# Altium PCB PCB.PcbDoc
Units mm, origin at the board's own origin, x right, y up, seen from the top; angles counter-clockwise.
Board outline 67.95 x 87 mm, 2 copper layers (Top Layer, Bottom Layer); 64 components, 68 nets, 243 pads, 96 vias.
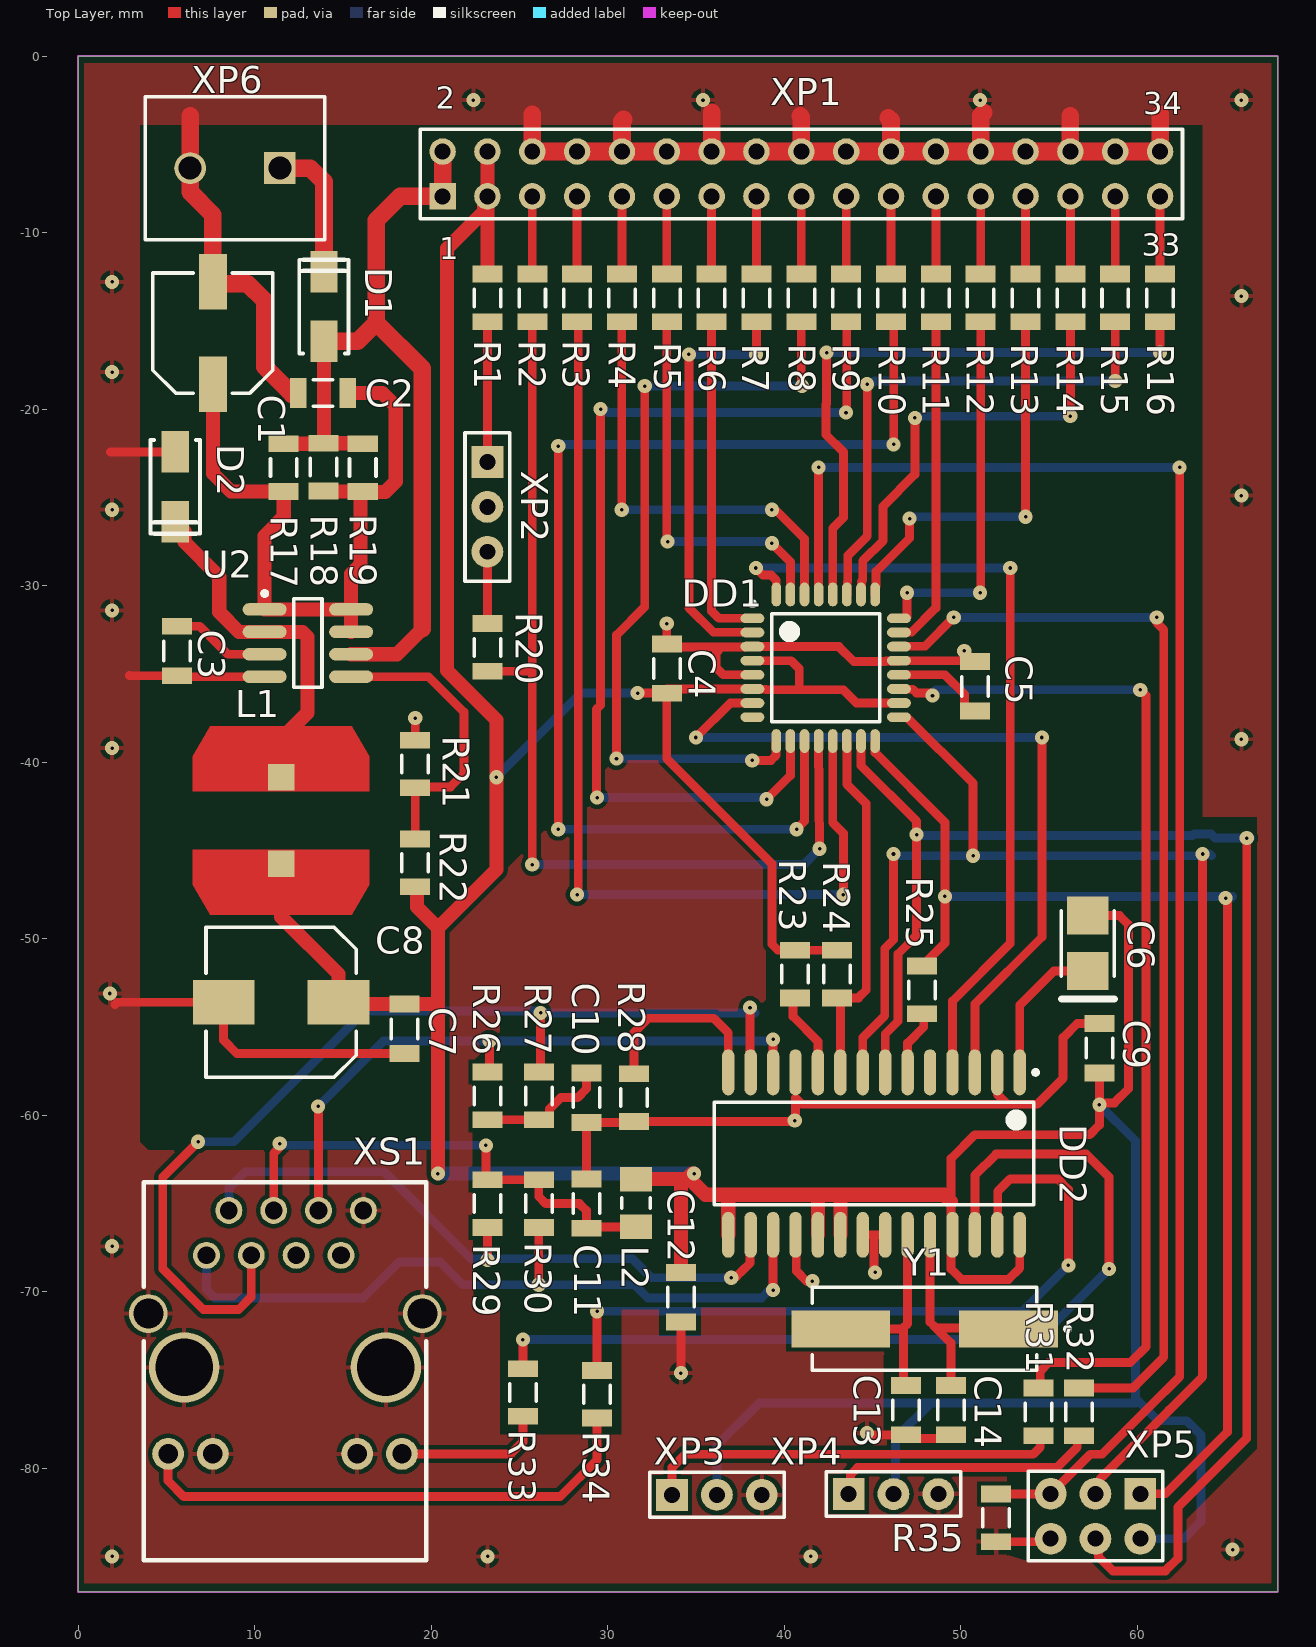
[diagram p0: Top Layer view]
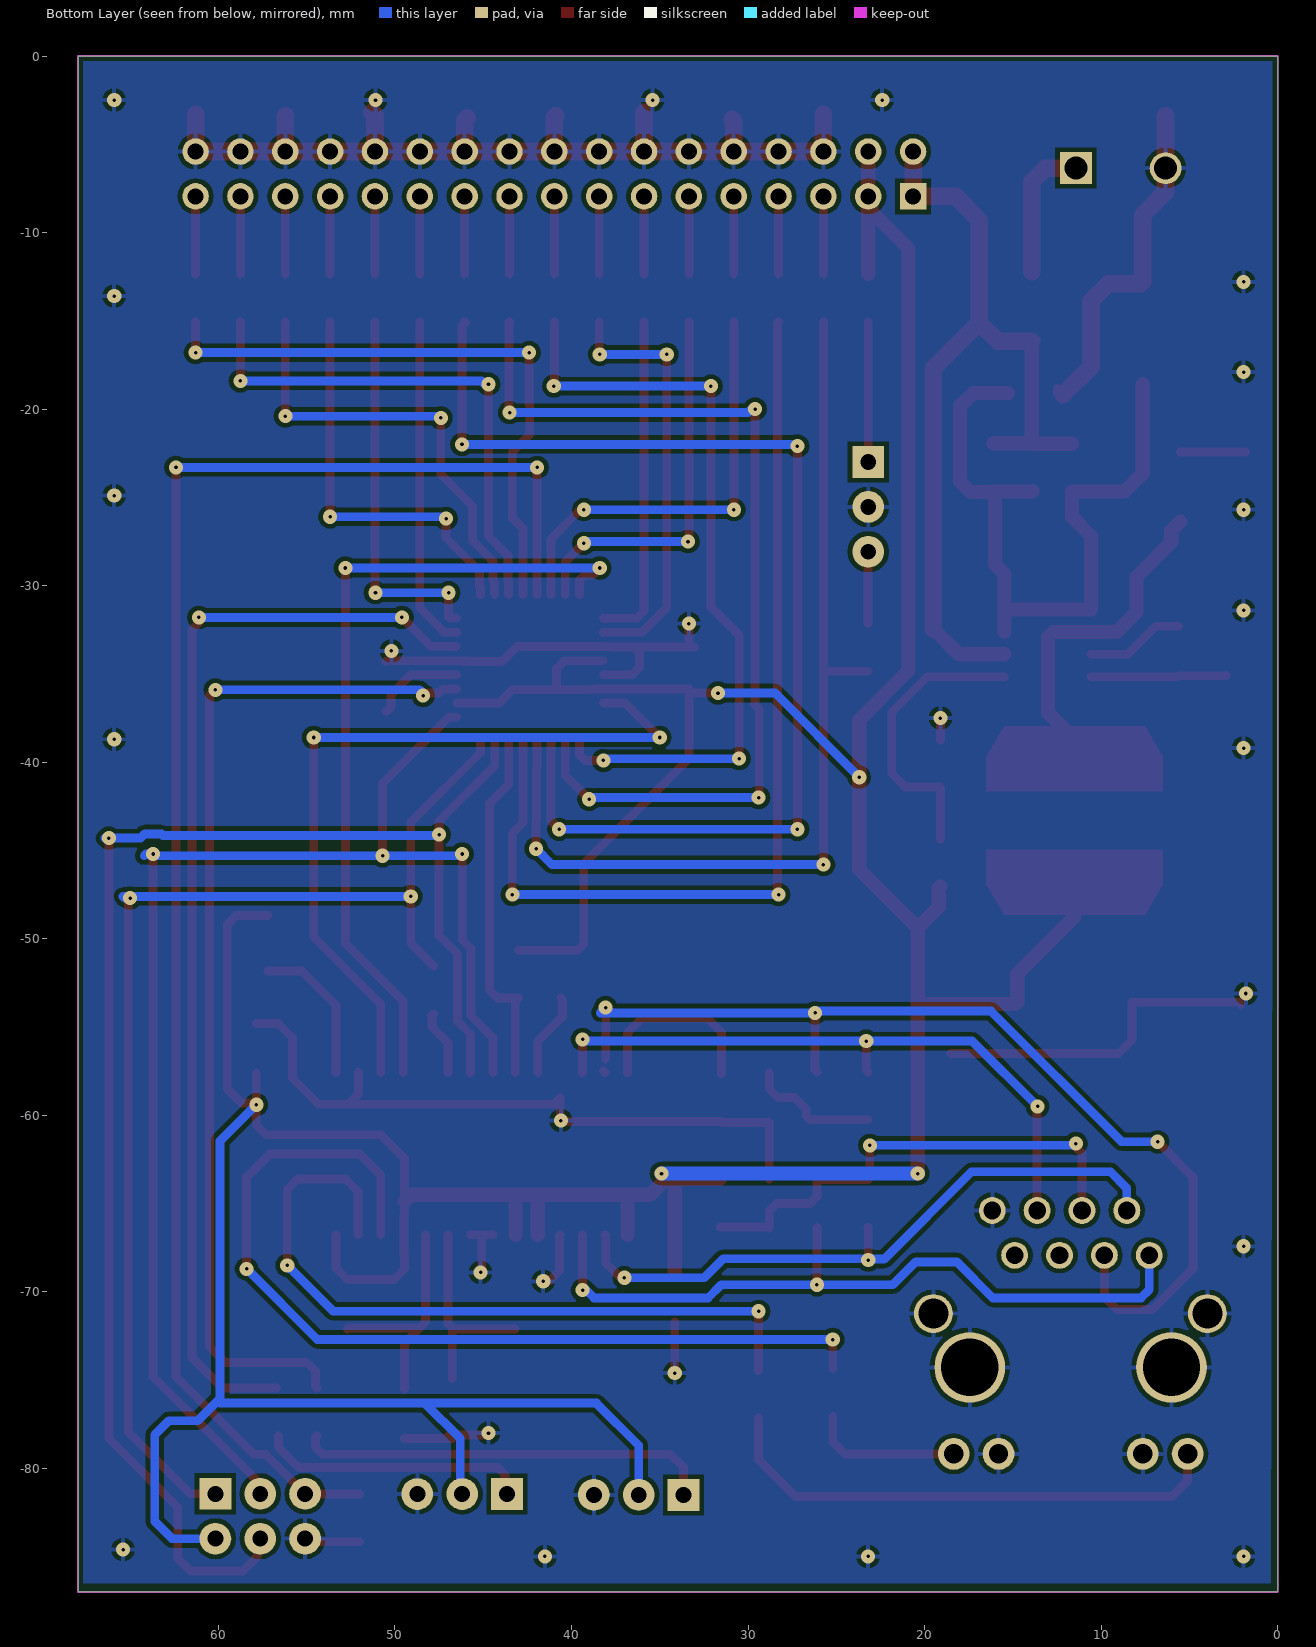
[diagram p1: Bottom Layer view, seen from below]

## Layer stack, top to bottom
Top Solder: solder mask 0.0102, Solder Resist, Dk 3.5
Top Layer: signal copper 0.0356
Dielectric 1: dielectric 0.32, FR-4, Dk 4.8
Bottom Layer: signal copper 0.0356
Bottom Solder: solder mask 0.0102, Solder Resist, Dk 3.5

## Board outline
0,-87 67.95,-87 67.95,0 0,0

## Design rules (kind name [scope] priority, off if disabled: settings)
Clearance [All] p1: gap=0.254 ignorepadtopadclearanceinfootprint=TRUE except(0: Arc-Hole Track-Hole SMDPad-Hole THPad-Hole Via-Hole Fill-Hole Poly-Hole Region-Hole Text-Hole)
HoleSize [All] p1 off: absolutevalues=TRUE maxlimit=2.54 minlimit=0.025 maxpercent=80.000 minpercent=20.000
HoleToHoleClearance [All] p1 off: gap=0.254 allowstackedmicrovias=TRUE
MinimumSolderMaskSliver [All] p1 off: minsoldermaskwidth=0.254
PolygonConnect [All] p1: connectstyle=Relief reliefconductorwidth=0.254 reliefentries=4 polygonreliefangle="90 Angle" airgapwidth=0.254
RoutingVias [All] p1: holewidth=0.711 width=0.8 viastyle="Through Hole" minholewidth=0.711 minwidth=0.8 maxholewidth=0.711 maxwidth=1.27
SilkToSilkClearance [All] p1 off: silktosilkclearance=0.254
SilkToSolderMaskClearance [IsPad] p1 off: minsilkscreentomaskgap=0.254 clearancetoexposedcopper=TRUE
SolderMaskExpansion [All] p1: expansion=0.1
Width GND [InNet('GND')] p1: maxlimit=1 minlimit=0.5 preferedwidth=0.8 minimp=50.000000 maximp=50.000000 favimp=50.000000
Width +12 [InNet('+12')] p2: maxlimit=1 minlimit=0.5 preferedwidth=0.8 minimp=50.000000 maximp=50.000000 favimp=50.000000
Width VCC [InNet('VCC')] p3: maxlimit=1 minlimit=0.5 preferedwidth=0.8 minimp=50.000000 maximp=50.000000 favimp=50.000000
Width +5 [InNet('NetC1_1')] p4: maxlimit=1 minlimit=0.5 preferedwidth=0.8 minimp=50.000000 maximp=50.000000 favimp=50.000000
Width +5_2 [InNet('NetD2_1')] p5: maxlimit=1 minlimit=0.5 preferedwidth=0.8 minimp=50.000000 maximp=50.000000 favimp=50.000000
Width +5_1 [InNet('+5')] p6: maxlimit=1 minlimit=0.5 preferedwidth=0.8 minimp=50.000000 maximp=50.000000 favimp=50.000000
Width Width_1 [All] p7: maxlimit=0.5 minlimit=0.254 preferedwidth=0.35 minimp=50.000000 maximp=50.000000 favimp=50.000000
25 further rules are at their usual default settings.

## Classes and differential pairs
component class Power: C1 C2 C3 C7 C8 D1 D2 L1 R17 R18 R19 R21 R22 U2 XP6
component class MCU: C4 C5 C9 DD1 R1 R2 R3 R4 R5 R6 R7 R8 R9 R10 R11 R12 R13 R14 R15 R16 R20 R31 R32 R35 XP1 XP2 XP3 XP4 XP5
component class LAN: C6 C10 C11 C12 C13 C14 DD2 L2 R23 R24 R25 R26 R27 R28 R29 R30 R33 R34 XS1 Y1

## Components (designator, comment, footprint, x,y, rotation, side; value= is the part's Value field where it differs from the comment)
C1 "CAP_ELEC_SMD" ECAP_SMD_6.3mmx5.4mm 7.64,-15.69 r90 top
C2 "CAP_SMD" CAPC1206(3216)170_L 13.88,-19.08 r0 top
C3 "CAP_SMD" CAPC1206(3216)170_L 5.6,-33.7 r90 top
C4 "CAP_SMD" CAPC1206(3216)170_L 33.35,-34.7 r270 top
C5 "CAP_SMD" CAPC1206(3216)170_L 50.8,-35.7 r270 top
C6 "CAP_Tantalum" CAP_3530 57.2,-50.26 r90 top
C7 "CAP_SMD" CAPC1206(3216)170_L 18.5,-55.1 r90 top
C8 "CAP_ELEC_SMD" ECAP_SMD_8mmx10mm 11.5,-53.6 r180 top
C9 "CAP_SMD" CAPC1206(3216)170_L 57.85,-56.2 r270 top
C10 "CAP_SMD" CAPC1206(3216)170_L 28.8,-59 r270 top
C11 "CAP_SMD" CAPC1206(3216)170_L 28.8,-65 r90 top
C12 "CAP_SMD" CAPC1206(3216)170_L 34.15,-70.3 r90 top
C13 "CAP_SMD" CAPC1206(3216)170_L 46.9,-76.7 r270 top
C14 "CAP_SMD" CAPC1206(3216)170_L 49.45,-76.7 r270 top
D1 "SS14" DO-214 13.93,-14.19 r270 top
D2 "SS14" DO-214 5.5,-24.4 r90 top
DD1 "ATmega328-AU" 32A_L 42.35,-34.65 r0 top locked
DD2 "ENC28J60-I/SO" SO-28_M 45.085,-62.167 r270 top locked
L1 "220uH" SDR1006_SMD 11.5,-43.3 r0 top
L2 "Inductor" IND_1206 31.6,-64.969 r90 top value=10uH
R1 "RES_SMD" RESC1206(3216)_L 23.19,-13.7 r90 top
R2 "RES_SMD" RESC1206(3216)_L 25.73,-13.7 r90 top
R3 "RES_SMD" RESC1206(3216)_L 28.27,-13.7 r90 top
R4 "RES_SMD" RESC1206(3216)_L 30.81,-13.7 r90 top
R5 "RES_SMD" RESC1206(3216)_L 33.35,-13.7 r90 top
R6 "RES_SMD" RESC1206(3216)_L 35.89,-13.7 r90 top
R7 "RES_SMD" RESC1206(3216)_L 38.43,-13.7 r90 top
R8 "RES_SMD" RESC1206(3216)_L 40.97,-13.7 r90 top
R9 "RES_SMD" RESC1206(3216)_L 43.51,-13.7 r90 top
R10 "RES_SMD" RESC1206(3216)_L 46.05,-13.7 r90 top
R11 "RES_SMD" RESC1206(3216)_L 48.59,-13.7 r90 top
R12 "RES_SMD" RESC1206(3216)_L 51.13,-13.7 r90 top
R13 "RES_SMD" RESC1206(3216)_L 53.67,-13.7 r90 top
R14 "RES_SMD" RESC1206(3216)_L 56.21,-13.7 r90 top
R15 "RES_SMD" RESC1206(3216)_L 58.75,-13.7 r90 top
R16 "RES_SMD" RESC1206(3216)_L 61.29,-13.7 r90 top
R17 "RES_SMD" RESC1206(3216)_L 11.653,-23.31 r90 top
R18 "RES_SMD" RESC1206(3216)_L 13.903,-23.285 r90 top
R19 "RES_SMD" RESC1206(3216)_L 16.128,-23.31 r90 top
R20 "RES_SMD" RESC1206(3216)_L 23.2,-33.5 r90 top
R21 "RES_SMD" RESC1206(3216)_L 19.1,-40.1 r90 top
R22 "RES_SMD" RESC1206(3216)_L 19.1,-45.7 r270 top
R23 "RES_SMD" RESC1206(3216)_L 40.6,-52 r270 top
R24 "RES_SMD" RESC1206(3216)_L 43,-52 r270 top
R25 "RES_SMD" RESC1206(3216)_L 47.8,-52.9 r270 top
R26 "RES_SMD" RESC1206(3216)_L 23.2,-58.9 r270 top
R27 "RES_SMD" RESC1206(3216)_L 26.1,-58.9 r270 top
R28 "RES_SMD" RESC1206(3216)_L 31.5,-59 r90 top
R29 "RES_SMD" RESC1206(3216)_L 23.2,-65 r90 top
R30 "RES_SMD" RESC1206(3216)_L 26.1,-65 r90 top
R31 "RES_SMD" RESC1206(3216)_L 54.4,-76.8 r270 top
R32 "RES_SMD" RESC1206(3216)_L 56.7,-76.8 r270 top
R33 "RES_SMD" RESC1206(3216)_L 25.2,-75.7 r90 top
R34 "RES_SMD" RESC1206(3216)_L 29.4,-75.8 r90 top
R35 "RES_SMD" RESC1206(3216)_L 52,-82.8 r90 top locked
U2 "MC34063ABD-TR" SO-8_M 13.02,-33.25 r0 top
XP1 "" HDR2X17 20.65,-7.95 r0 top locked
XP2 "PBS-03" PBS-03 23.19,-23 r270 top locked
XP3 "PLS-03" PLS-03 33.65,-81.5 r0 top locked
XP4 "PLS-03" PLS-03 43.65,-81.45 r0 top
XP5 "PLS-03_2" PLS-03_2 60.17,-81.44 r180 top locked
XP6 "1729128" PHOE-1729128-2_V 8.89,-6.35 r180 top locked
XS1 "HR911105A" HR911105A 19.725,-63.8 r180 top locked
Y1 "25Mhz" Crystal_SMD 47.95,-72.1 r180 top locked

## Footprints (in the part's own frame and the unit in brackets; to place one, negate y for a bottom-side part, rotate by r counter-clockwise, add the part's x,y. Pads: shape width x height; smd on the part's side, far side on the other; paste and mask are expansions set on the pad)
32A_L [mm] "Thin QFP, 32-Leads, Body 7x7mm, Pitch 0.8mm, IPC High Density"
  oval 1.35x0.55 smd: 1(-4.15,2.8) 2(-4.15,2) 3(-4.15,1.2) 4(-4.15,0.4) 5(-4.15,-0.4) 6(-4.15,-1.2) 7(-4.15,-2) 8(-4.15,-2.8) 17(4.15,-2.8) 18(4.15,-2) 19(4.15,-1.2) 20(4.15,-0.4) 21(4.15,0.4) 22(4.15,1.2) 23(4.15,2) 24(4.15,2.8)
  oval 0.55x1.35 smd: 9(-2.8,-4.15) 10(-2,-4.15) 11(-1.2,-4.15) 12(-0.4,-4.15) 13(0.4,-4.15) 14(1.2,-4.15) 15(2,-4.15) 16(2.8,-4.15) 25(2.8,4.15) 26(2,4.15) 27(1.2,4.15) 28(0.4,4.15) 29(-0.4,4.15) 30(-1.2,4.15) 31(-2,4.15) 32(-2.8,4.15)
  silkscreen extent -4.27,-3.05 3.05,3.75, body extent -3.5,-3.5 3.5,3.5, height 1.2
CAP_3530 [mm] "Molded Capacitor, 2-Leads, Body 3.70x3.00mm, IPC Low Density"
  rect 2.15x2.35 smd: 1(-1.575,0) 2(1.575,0)
  silkscreen extent -3.15,-1.5 1.85,1.5, body extent -2.07,-1.5 2.07,1.5, height 2.1
CAPC1206(3216)170_L [mm] "Chip Capacitor, Body 3.2x1.6mm, Height 1.7mm, IPC High Density"
  rect 0.95x1.7 smd: 1(-1.4,0) 2(1.4,0)
  silkscreen extent -0.55,-0.75 0.55,0.75, body extent -1.7,-0.9 1.7,0.9, height 1.7
Crystal_SMD [mm] "SMD, 2-Leads, Body 11.4x4.7mm"
  rect 5.6x2.1 smd: 1(-4.75,0) 2(4.75,0)
  silkscreen extent -8.23,-2.35 6.35,2.35, body extent -6.35,-2.35 6.35,2.35, height 4.16
DO-214 [mm] "Molded Diode, 2-Leads, Body 5,10x2,67mm, IPC Medium Density"
  rect 2.35x1.55 smd: 1(-1.975,0) 2(1.975,0)
  silkscreen extent -2.65,-1.4 2.65,1.4, body extent -2.64,-1.4 2.64,1.39, height 2.2
ECAP_SMD_6.3mmx5.4mm [mm] "Aluminum Electrolytic Capacitor, Body 6.8x6.8mm, IPC Medium Density"
  rect 3.15x1.6 smd: 1(-2.9,0) 2(2.9,0)
  silkscreen extent -3.4,-3.4 3.4,3.4, body extent -3.9,-3.4 3.9,3.4, height 6.3
ECAP_SMD_8mmx10mm [mm] "Aluminum Electrolytic Capacitor, Diameter 8mm, Height 10.8mm, Pitch 6.5mm"
  rect 3.5x2.5 smd: 1(-3.25,0) 2(3.25,0)
  silkscreen extent -4.25,-4.25 4.25,4.25, body extent -3.99,-3.97 3.99,4, height 10.8
HDR2X17 [mm] "Connector; Header; 17x2 Position"
  rect 1.5x1.5 hole 0.9: 1(0,0)
  round 1.5 hole 0.9: 2(0,2.54) 3(2.54,0) 4(2.54,2.54) 5(5.08,0) 6(5.08,2.54) 7(7.62,0) 8(7.62,2.54) 9(10.16,0) 10(10.16,2.54) 11(12.7,0) 12(12.7,2.54) 13(15.24,0) 14(15.24,2.54) 15(17.78,0) 16(17.78,2.54) 17(20.32,0) 18(20.32,2.54) 19(22.86,0) 20(22.86,2.54) 21(25.4,0) 22(25.4,2.54) 23(27.94,0) 24(27.94,2.54) 25(30.48,0) 26(30.48,2.54) 27(33.02,0) 28(33.02,2.54) 29(35.56,0) 30(35.56,2.54) 31(38.1,0) 32(38.1,2.54) 33(40.64,0) 34(40.64,2.54)
  silkscreen extent -1.27,-1.27 41.91,3.81
HR911105A [mm] "Magjack"
  round 1.524 hole 1: 1(12.45,4.13) 2(11.18,1.59) 3(9.91,4.13) 4(8.64,1.59) 5(7.37,4.13) 6(6.1,1.59) 7(4.83,4.13) 8(3.56,1.59)
  round 2.2 hole 1.7: 8(0.225,7.43) 8(15.745,7.43)
  round 4 hole 3.25: 8(2.285,10.48) 8(13.715,10.48)
  round 1.8 hole 1.1: 9(14.625,15.38) 10(12.085,15.38) 11(3.915,15.38) 12(1.375,15.38)
  silkscreen extent 0,0 16,21.4, body extent 0.07,-0.02 15.95,21.37, height 13.7
IND_1206 [mm] "Chip Inductor, 2-Leads, Body 3.40x1.80mm, IPC Medium Density"
  rect 1.39x1.82 smd: 1(-1.355,0) 2(1.355,0)
  silkscreen extent -0.3,-0.81 0.3,0.81, body extent -1.7,-0.9 1.7,0.9, height 1.3
PBS-03 [mm]
  rect 1.8x1.8 hole 0.9: 1(0,0)
  round 1.8 hole 0.9: 2(2.54,0) 3(5.08,0)
  silkscreen extent -1.67,-1.27 6.75,1.27, body extent -1.67,-1.27 6.75,1.27, height 8.5
PHOE-1729128-2_V [mm] "Receptacle, 2-Leads, Body 8.1x10.16mm, Pitch 5.08mm"
  rect 1.8x1.8 hole 1.3: 1(-2.54,0)
  round 1.8 hole 1.3: 2(2.54,0)
  silkscreen extent -5.08,-4.05 5.08,4.05, body extent -5.65,-4.05 5.08,4.05, height 10.01
PLS-03 [mm]
  rect 1.8x1.8 hole 0.9: 1(0,0)
  round 1.8 hole 0.9: 2(2.54,0) 3(5.08,0)
  silkscreen extent -1.27,-1.27 6.35,1.27, body extent -1.27,-1.27 6.35,1.27, height 8.6
PLS-03_2 [mm]
  rect 1.8x1.8 hole 0.9: 1(0,0)
  round 1.8 hole 0.9: 2(0,2.54) 3(2.54,0) 4(2.54,2.54) 5(5.08,0) 6(5.08,2.54)
  silkscreen extent -1.27,-1.27 6.35,3.8, body extent -1.27,-1.27 6.35,3.81, height 8.6
RESC1206(3216)_L [mm] "Chip Resistor, Body 3.2x1.6mm, IPC High Density"
  rect 0.95x1.7 smd: 1(-1.35,0) 2(1.35,0)
  silkscreen extent -0.5,-0.75 0.5,0.75, body extent -1.67,-0.87 1.67,0.87, height 0.75
SDR1006_SMD [mm] "SMD, 2-Leads, Body 9.8x9.8mm"
  rect 1.5x1.5 smd: 1(0,2.45) 2(0,-2.45)
  Top Layer region: -5,1.65 -5,3.65 -4,5.35 4,5.35 5,3.65 5,1.65
  Top Layer region: 5,-1.65 5,-3.65 4,-5.35 -4,-5.35 -5,-3.65 -5,-1.65
  body extent -4.9,-4.89 4.9,4.89, height 5.93
SO-8_M [mm] "SOIC, 8-Leads, Body 4.9x3.9mm, Pitch 1.27mm, IPC Low Density"
  oval 2.5x0.7 smd: 1(-2.45,1.905) 2(-2.45,0.635) 3(-2.45,-0.635) 4(-2.45,-1.905) 5(2.45,-1.905) 6(2.45,-0.635) 7(2.45,0.635) 8(2.45,1.905)
  silkscreen extent -2.57,-2.5 0.8,2.93, body extent -3.02,-2.45 3.02,2.45, height 1.65
SO-28_M [mm] "SOIC, 28-Leads, Body 17.9x7.5mm, Pitch 1.27mm, IPC Low Density"
  oval 2.6x0.7 smd: 1(-4.6,8.255) 2(-4.6,6.985) 3(-4.6,5.715) 4(-4.6,4.445) 5(-4.6,3.175) 6(-4.6,1.905) 7(-4.6,0.635) 8(-4.6,-0.635) 9(-4.6,-1.905) 10(-4.6,-3.175) 11(-4.6,-4.445) 12(-4.6,-5.715) 13(-4.6,-6.985) 14(-4.6,-8.255) 15(4.6,-8.255) 16(4.6,-6.985) 17(4.6,-5.715) 18(4.6,-4.445) 19(4.6,-3.175) 20(4.6,-1.905) 21(4.6,-0.635) 22(4.6,0.635) 23(4.6,1.905) 24(4.6,3.175) 25(4.6,4.445) 26(4.6,5.715) 27(4.6,6.985) 28(4.6,8.255)
  silkscreen extent -4.72,-9.05 2.9,9.28, body extent -3.8,-9.05 3.8,9.05, height 2.65

## Part data
C2 C3 C4 C5 C7 C9 C10 C11 C12 C13 C14: "Ceramic capacitor, 0805"
  C2 C4 C5 C7 C9 C10 C11 C12: Val=100nF
  C3: Val=470pF
  C13 C14: Val=18pF
C6: Capacitance=10uF, Voltage=16V
C8: Rated Capacitance=470uF, Rated Voltage=6.3V
D1 D2: "Schottky Rectifier, 1.1 W, -65 to 125 degC, 2-Pin SMD, RoHS, Tape and Reel", Average Forward Current-Max (A)=1, Manufacturer=Fairchild, Package Body Material=PLASTIC/EPOXY, Package Description="2-Pin Surface Mount Device, Body 4.375 x 2.725 mm", Package Reference=DO-214AC-2, Package Shape=RECTANGULAR, Package Style=SMALLOUTLINE, Peak Reflow Temperature (Cel)=260, Power Dissipation Limit-Max (W)=1.1, Rep Pk Reverse Voltage-Max (V)=40, Additional Feature=FREEWHEELINGDIODE, CAGE Code=1HBD3,07933,59621,7D893, Configuration=SINGLE, Datasheet URL=http://www.onlinecomponents.com/datasheet/ss14.aspx?p=11369800, Datasheet Version=Oct-13, Diode Element Material=SILICON, JEDEC-95 Code=DO-214AC, JESD-30 Code=R-PDSO-C2, JESD-97 Code=e3, Lead Free=YES, Manufacturer URL=https://www.fairchildsemi.com/, Moisture Sensitivity Level=1, Number of Elements=1, Number of Terminals=2, Package URL=https://www.fairchildsemi.com/package-drawings/DO/DO214AC.pdf, RoHS Compliant=YES, Signal Diode Type=SIGNALDIODE, Surface Mount=YES, Technology=SCHOTTKY, Terminal Finish=MATTETIN, Terminal Form=CBEND, Terminal Position=DUAL
DD1: "8-bit AVR Microcontroller, 32KB Flash, 1KB EEPROM, 2KB SRAM, 32-pin TQFP, Industrial Grade (-40°C to 85°C)", Code_JEDEC=MS-026-ABA, DatasheetVersion="revA, Jan-2010", PackageDescription="32-Lead, 7x7x1.0 mm Body, 0.8mm Lead Pitch, Thin Profile Plastic Quad Flat Package (TQFP)", PackageReference=32A, PackageVersion="revB, Oct-2001"
DD2: "Stand-Alone Ethernet Controller with SPI Interface, 28-Pin SOIC, Industrial Temperature", Code_JEDEC=MS-013, ComponentLink1Description="Manufacturer URL", ComponentLink1URL=http://www.microchip.com/, ComponentLink2Description=Datasheet, ComponentLink2URL=http://ww1.microchip.com/downloads/en/DeviceDoc/39662c.pdf, ComponentLink3Description="Package Specification", ComponentLink3URL=http://www.microchip.com/stellent/groups/techpub_sg/documents/packagingspec/en012702.pdf, DatasheetVersion="revC, Jan-2008", PackageDescription="28-Lead Plastic Small Outline (SO) - Wide 7.50mm Body [SOIC]", PackageReference=SOIC-SO28, PackageVersion="revBB, Aug-2009", RevisionNote="URLs added."
L1: library part "Inductor power", "Inductor for Power Circuits", Current - Saturation=2.62A, DC Resistance (DCR)=43mOhmMax, Frequency - Test=100kHz, Inductance=2.2µH, Manufacturer=TDK, Operating Temperature=-40°C~105°C, Package / Case=Nonstandard, Package Description="2-Pin Surface Mount Device, Body 5 x 5 mm", Package Reference=VLCF5020T-3, Standard Package=1, Tolerance=±30%, Catalog Drawings=VLCF50[20,20-(1,3),28-2]SeriesTopVLCF50[20,20-(1,3),28-2]SeriesFootprintVLCF50[20,20-(1,3)]SeriesSide, Category=Inductors,Coils,Chokes, Current Rating=2.62A, Datasheet URL=https://product.tdk.com/info/en/catalog/datasheets/inductor_commercial_power_vlcf5020-3_en.pdf, Datasheet Version=04/2016, EDA / CAD Models=DownloadfromAcceleratedDesigns, Family=FixedInductors, Height - Seated (Max)="0.079\"(2.00mm)", Manufacturer URL=http://www.tdk.com/, Material - Core=Ferrite, Mounting Technology=SurfaceMount, Mounting Type=SurfaceMount, Online Catalog=VLCFSeries, Other Names=445-4557-1, Packaging=CutTape(CT), Series=VLCF, Shielding=Shielded, Size / Dimension="0.197\"Lx0.197\"W(5.00mmx5.00mm)", Type=Wirewound
R1 R2 R3 R4 R5 R6 R7 R8 R9 R10 R11 R12 R13 R14 R15 R16 R17 R18 R19 R20 R21 R22 R24 R28 R31 R32 R33 R34 R35: "RES0805"
  R1 R20 R33 R34: Val=270
  R2 R3 R4 R5 R6 R7 R8 R9 R10 R11 R12 R13 R14 R15 R16 R31 R32: Val=300
  R17 R18 R19: Val=0
  R21: Val=11K
  R22: Val=18K
  R24: Val=10K
  R28: Val=2.3K
  R35: Val=N/C
U2: library part MC34063A, "DC/DC converter control circuit, 8-Pin SO, Tape and Reel", Code_IPC=SOIC127P600-8, Code_JEDEC=MS-012-AA, ComponentLink1Description="Manufacturer URL", ComponentLink1URL=http://www.st.com, ComponentLink2Description=Datasheet, ComponentLink2URL=http://www.st.com/internet/com/TECHNICAL_RESOURCES/TECHNICAL_LITERATURE/DATASHEET/CD00001232.pdf, ComponentLink3Description="Package Specification", ComponentLink3URL=http://www.st.com/internet/com/TECHNICAL_RESOURCES/TECHNICAL_LITERATURE/PACKAGE_INFORMATION/CD00004680.pdf, DatasheetVersion=Nov-2007, PackageDescription="8-Pin Small Outline Integrated Circuit 1.27 mm Pitch", PackageReference=SO8, PackageVersion=Dec-2002
XP1: library part "Header 17X2", "Header, 17-Pin, Dual row", LatestRevisionDate=17-Jul-2002, LatestRevisionNote="Re-released for DXP Platform.", Publisher="Altium Limited"
XP6: library part Terminal_2_Green, "PCB Terminal Block, 13.5 A, 400 V, 2-Pin THD, RoHS, Bulk", Current Rating=13500mA, Manufacturer="Phoenix Contact", Package Description="2-Pin Through Hole Device, Body 8.1 x 10.16 mm, Pitch 5.08 mm", Package Reference=1729128-2, Package Version=03/2015, Voltage Rating=400V, Datasheet URL=https://datasheet.ciiva.com/16046/1729128-16046181.pdf, Datasheet Version=12/2013, Manufacturer URL=http://www.phoenixcontact.com/, Mounting Technology=ThroughHole, No. of Positions=2, No. of Rows=1, Orientation=Horizontal, Package URL=https://www.phoenixcontact.com/online/portal/pi/pxc/product_detail_page/!ut/p/b1/3VdJjqNKFDxLH8AFycySyWY2ozFsEPOMMQaDOX1XedGL_1Vdm5YXJleknhSKeBkvI6EA8ncAo3AYoDhBQGco6KN7VURTdemj9us_IEKEZo_YHiPAEWEFmDGOHMORkqKYCORBZxgL7ZoaZYcbFFUZ3fqxSY6GOuxydWUuHqz1ynmMFygu583Bob0Ewr6Sd_l-5m-kAueHiB0jpRwZwe58wwtkpxtMYd_LmGcDRU02dRNEyWt6Y2ti5pSyJ_reIkzIulrqApdnbT11V5jnCKbYNCvhEM1MCpPByat_X379-iThf08CI5GfOPqfBeS3BRoBOdD55AKVv0iLwCMq-2BrzXWSGRH7pUGD9uwXQjiph3xL0DKQwdGa0JImiIOmBNOestqgwTHSSs2oOep-78apyXQBvNi8ZLaFjvjWvcaUEBu0MC6Wbe-d6mB0FAebo2lUWinqYaZs5DAYzV0RP9yitUjnGJ0iI9xhZkT42OCQNUJJhkgWINNQLP2JFP6OpMg3JCVg70jqHT0lvKOnhHf0lPuOnnLf0VPuWx6_dxwUIvwk5WMkT0kLL1mh61l2yZVSzG3pYV_bqo-mj6uMKwKwdnnW8Jh5RTOJzMOA5c-eJDaZQw4mTMPH02PvS_ZAqNVjVTo2WyYLkwH_KU1mmmG5kjRhDqPXLwwVHvVOjCM60-fpXvTDfMGW1PVFVS1r4e4yVDk4ZdNbkUHvqPqQSeian4UD39fNKmachqdJ1NJbyk8rXT9mXTvPk3oE5meulKGgiruPJek-4I9hTT6G8ZLOyRSm2RRVbThERQad5OS28hdt4YW4vG0stgYYzsWsK4_7y6DZMjJSCqri1kyiZR5vD7pwIrNR7QwPHTcLTI5qT7eRlpHrdGiupYlqQDJ7zy_CND8fWWBoLRXxk1RVcXiBQwbTD4Xi7KL-FuO94t9xaqweXzH, Packing=Bulk, PartNumber=1729128, Pitch=5.08mm, RoHS=TRUE
XS1: library part "RJ-45 HR911105A", Order=HR911105A
Y1: library part Crystal, "Low Profile Crystal", Case Height=4.2mm, Case Length=11.4mm, Case Width=4.7mm, Frequency=8MHz, Frequency Stability=50PPM, Load Capacitance=18pF, Manufacturer=ABRACON, Operating Temperature Range=-20Cto+70C, Package / Case=HC-49/US, Package Description="2-Pin Surface Mount Device, Body 11.4 x 4.7 mm", Package Reference=ABLS-14.7456MHZ-B2-T, Tolerance=30PPM, Brand=ABRACON, Datasheet URL=http://www.abracon.com/Resonators/abls.pdf, Datasheet Version=04/2011, Dimensions=4.7mmWx11.4mmLx4.2mmH, ESR=80Ohms, Factory Pack Quantity=1000, Manufacturer URL=http://www.abracon.com/, Mounting Style=SMD/SMT, Mounting Technology=SurfaceMount, Package URL=http://www.abracon.com/Support/PackageDrawing/Resonators/ABLS-2D.pdf, Packaging=Reel, Product Category=Crystals, RoHS=Details, Series=ABLS, Termination Style=SMD/SMT, Type=LowProfileMicroprocessorCrystal
C1: Val=100uF
R23: Val=10K
R25: Val=270
R26 R27 R29 R30: Val=50

## Via types
v1: diameter 0.8, hole 0.2, Top Layer to Bottom Layer, tented both sides, 96 vias

## Nets (pads, with @x,y where several pads share a name; then routed paths per layer and width w, separated by ;. In a path a pad name is that pad's centre, name@x,y a point inside that pad or via, vN(x,y) a via of type N, cw(c..) or ccw(c..) an arc to the next point about the centre after c; other vN are vias at no path point)
+5: C4.2 C6.2 C7.2 C8.1 C9.2 C12.2 DD1.4 DD1.6 DD1.18 DD2.15 DD2.19 DD2.20 DD2.25 DD2.28 L1.2 L2.2 R1.2 R22.2 R23.1 R24.1 XP1.3 XP1.4 XP3.2 XP4.2 XP5.2 | length 282
  Top Layer w0.5: v1(31.7,-36.083) 33.333,-36.083 C4.2 33.35,-39.8 39.3,-45.75 39.3,-50.3 39.65,-50.65 R23.1 R24.1 ; C4.2@33.35,-35.85 DD1.6 38.21,-35.86 38.645,-35.86 38.656,-35.871 38.952,-35.871 38.981,-35.9 40.85,-35.9 ; DD1.4 40.4,-34.25 40.85,-34.7 40.85,-35.9 ; DD1.18 44.1,-36.65 43.35,-35.9 40.85,-35.9 ; DD2.28 53.34,-68.66 52.7,-69.3 50.05,-69.3 49.45,-68.7 49.45,-67.938 49.492,-67.897 49.492,-66.805 DD2.25 49.492,-66.729 49.492,-65.637 49.45,-65.596 49.45,-64.889 49.45,-62.45 50.8,-61.1 57.3,-61.1 57.85,-60.55 v1(57.85,-59.4) ; C6.2 58.985,-48.685 59.5,-49.2 59.5,-58.5 58.704,-59.296 57.954,-59.296 v1(57.85,-59.4) ; C9.2 v1(57.85,-59.4)
  Top Layer w0.8: L1.2 11.5,-48.75 14.75,-52 C8.1 14.85,-53.7 C7.2 20.385,-53.7 ; R22.2 19.125,-47.05 19.2,-47.125 19.2,-48.2 20.385,-49.385 ; v1(20.385,-63.3) 20.385,-53.7 ; R1.2 XP1.3 ; XP1.4 XP1.3 ; L2.2 34,-63.614 ; C12.2 34.15,-63.764 34,-63.614 ; v1(34.9,-63.3) 34.773,-63.3 34.459,-63.614 ; DD2.15 36.83,-64.57 36.9,-64.5 ; DD2.19 41.91,-64.51 41.9,-64.5 ; DD2.20 43.18,-64.5 ; 49.45,-64.889 49.061,-64.5 43.18,-64.5 ; 20.385,-53.7 20.385,-49.385 ; 20.385,-49.385 23.7,-46.07 v1(23.7,-40.85) 23.7,-37.6 20.9,-34.8 20.9,-10.9 22.999,-8.801 22.999,-8.141 XP1.3 ; 34,-63.614 34.459,-63.614 ; 34.459,-63.614 34.648,-63.614 35.534,-64.5 36.9,-64.5 ; 36.9,-64.5 41.9,-64.5 ; 41.9,-64.5 43.18,-64.5
  Bottom Layer w0.5: v1(23.7,-40.85) 28.467,-36.083 v1(31.7,-36.083) ; XP3.2 36.19,-78.7 38.59,-76.3 48.3,-76.3 ; XP4.2 46.3,-81.34 46.3,-78.3 48.3,-76.3 ; v1(57.85,-59.4) 59.9,-61.45 59.9,-76 ; XP5.2 62.62,-83.98 63.6,-83 63.6,-78.1 62.8,-77.3 61.175,-77.3 59.9,-76.025 59.9,-76.3 48.3,-76.3
  Bottom Layer w0.8: v1(20.385,-63.3) v1(34.9,-63.3)
+12: D1.2 R17.2 R18.2 R19.2 U2.6 XP1.1 XP1.2 | length 49.4
  Top Layer w0.5: R18.2@13.878,-21.96 R18.2 R18.2@13.93,-21.908 ; R19.2@16.103,-21.935 R19.2
  Top Layer w0.8: R17.2 R18.2@13.878,-21.96 ; R18.2 R19.2@16.103,-21.935 ; R18.2@13.93,-21.908 D1.2 ; U2.6 18.065,-33.885 19.5,-32.45
  Top Layer w1: D1.2 15.835,-16.165 16.9,-15.1 ; 19.5,-32.45 19.5,-17.7 16.9,-15.1 ; XP1.2 XP1.1 18.25,-7.95 16.9,-9.3 16.9,-15.1
ADC6: R31.2 XP3.1 | length 23.6
  Top Layer w0.5: XP3.1 33.65,-79.95 34.4,-79.2 54.1,-79.2 54.5,-78.8 54.5,-78.25 R31.2
ADC7: R32.2 XP4.1 | length 15.3
  Top Layer w0.5: XP4.1 43.761,-81.339 43.761,-80.347 44.154,-79.954 55.446,-79.954 56.6,-78.8 R32.2@56.6,-78.15
GND: C1.2 C2.1 C3.1 C4.1 C5.1 C7.1 C8.2 C9.1 C10.2 C11.2 C12.1 C13.2 C14.2 D2.2 DD1.3 DD1.5 DD1.21 DD2.2 DD2.11 DD2.18 DD2.21 DD2.22 R21.2 R28.1 R35.1 U2.4 XP1.6 XP1.8 XP1.10 XP1.12 XP1.14 XP1.16 XP1.18 XP1.20 XP1.22 XP1.24 XP1.26 XP1.28 XP1.30 XP1.32 XP1.34 XP2.2 XP3.3 XP4.3 XP5.6 XP6.2 XS1.8 XS1.10 XS1.11 | length 182.9
  Top Layer w0.5: 1.825,-22.425 D2.2 ; 2.1,-53.715 2.215,-53.6 C8.2 8.25,-55.75 9,-56.5 C7.1 ; 2.91,-35.08 2.93,-35.1 C3.1 5.655,-35.155 U2.4 ; C1.2 C1.2@7.75,-12.9 ; C2.1@12.139,-19.169 12.354,-18.954 12.48,-18.827 C2.1 ; R21.2 v1(19.1,-37.5) ; C11.2 C10.2 31.45,-60.4 R28.1 40.55,-60.35 v1(40.6,-60.3) 40.64,-60.26 40.64,-59.003 41.008,-59.371 52.634,-59.371 ; C4.1@33.021,-33.471 36.472,-33.471 ; C4.1 v1(33.35,-32.15) ; v1(34.15,-74.6) C12.1 ; DD1.5 36.55,-35.05 36.15,-34.65 36.15,-33.793 36.472,-33.471 ; DD2.18 40.678,-66.805 40.678,-68.815 41.264,-69.4 v1(41.6,-69.4) ; DD2.21 45.085,-66.767 ; v1(44.7,-78) 44.8,-78.1 C13.2 ; v1(45.15,-68.9) 45.085,-68.835 45.085,-66.767 ; DD2.22 45.085,-66.767 ; C13.2@46.75,-78.3 C14.2@49.45,-78.3 ; C5.1@50.5,-34.3 50.45,-34.25 DD1.21 46.49,-34.26 46.055,-34.26 46.044,-34.271 45.748,-34.271 45.719,-34.3 43.95,-34.3 43.1,-33.45 DD1.3 38.19,-33.46 37.755,-33.46 37.744,-33.471 36.472,-33.471 ; R35.1 54.92,-84.15 XP5.6 ; DD2.2 52.07,-58.807 52.634,-59.371 ; C9.1 56.6,-54.8 55.8,-55.6 55.8,-57.9 54.329,-59.371 52.634,-59.371
  Top Layer w1: 6.35,-3.385 XP6.2 6.35,-7.7 7.64,-8.99 C1.2 ; C1.2@7.75,-12.9 9.6,-12.9 10.57,-13.87 10.57,-17.6 C2.1@12.139,-19.169 ; 25.73,-3.305 XP1.6 XP1.8 XP1.10 ; 30.9,-3.6 30.81,-3.69 XP1.10 ; 35.9,-3.2 35.89,-3.21 XP1.14 ; 40.9,-3.4 40.97,-3.47 XP1.18 ; 45.9,-3.5 46.05,-3.65 XP1.22 ; 51.3,-3.2 51.13,-3.37 XP1.26 ; 56.2,-3.4 56.21,-3.41 XP1.30 ; 61.29,-3.3 XP1.34 XP1.32 XP1.30 ; XP1.10 XP1.12 XP1.14 ; XP1.14 XP1.16 XP1.18 ; XP1.18 XP1.20 XP1.22 ; XP1.22 XP1.24 XP1.26 ; XP1.26 XP1.28 XP1.30
  other v1: 1.93,-84.987 23.2,-84.987 41.5,-84.987 65.4,-84.6 1.93,-67.418 1.803,-53.1 1.93,-39.2 65.9,-38.7 50.2,-33.7 1.93,-31.4 1.93,-25.7 65.9,-24.9 1.93,-17.9 65.9,-13.6 1.93,-12.79 22.4,-2.5 35.4,-2.5 51.1,-2.5 65.9,-2.5
LEDA: DD2.27 R34.2 | length 42.4
  Top Layer w0.5: R34.2 v1(29.4,-71.1) ; DD2.27 52.1,-66.737 52.1,-64.3 52.8,-63.6 55.5,-63.6 56.1,-64.2 v1(56.1,-68.5)
  Bottom Layer w0.5: v1(29.4,-71.1) 53.5,-71.1 v1(56.1,-68.5)
LEDB: DD2.26 R33.2 | length 53.7
  Top Layer w0.5: R33.2 v1(25.2,-72.7) ; DD2.26 50.8,-63.4 52,-62.2 57.1,-62.2 58.4,-63.5 v1(58.4,-68.7)
  Bottom Layer w0.5: v1(25.2,-72.7) 54.4,-72.7 v1(58.4,-68.7)
NetC1_1: C1.1 C2.2 R17.1 R18.1 R19.1 U2.1 U2.7 U2.8 | length 41.4
  Top Layer w0.8: C1.1 7.64,-23.64 8.66,-24.66 R17.1 11.653,-26.1 10.57,-27.183 U2.1 U2.8 ; R18.1 13.928,-24.66 R19.1 ; C2.2 17.23,-19.08 17.95,-19.8 18,-19.8 18,-24.1 17.4,-24.7 16.168,-24.7 R19.1 ; U2.7 U2.8 ; U2.8 15.47,-29.33 16,-28.8 16,-24.788 R19.1
NetC3_2: C3.2 U2.3 | length 5.6
  Top Layer w0.5: C3.2 6.9,-32.3 8.485,-33.885 U2.3
NetC5_2: C5.2 DD1.20 | length 5.3
  Top Layer w0.5: DD1.20 49.1,-35.05 50.218,-36.168 50.218,-36.875 50.443,-37.1 C5.2@50.5,-37.1
NetC6_1: C6.1 DD2.1 | length 8.5
  Top Layer w0.5: DD2.1@53.378,-57.529 DD2.1 53.34,-53.76 55.265,-51.835 C6.1
NetC10_1: C10.1 R26.2 R27.2 | length 7.4
  Top Layer w0.5: R26.2 R27.2 26.475,-60.25 26.7,-60.025 26.7,-59.65 27.35,-59 28.3,-59 28.8,-58.5 C10.1
NetC13_1: C13.1 DD2.23 Y1.2 | length 11.8
  Top Layer w0.5: Y1.2 46.69,-72.1 46.75,-72.04 ; C13.1@46.75,-74.9 46.75,-72.04 ; DD2.23 46.99,-71.8 46.75,-72.04
NetC14_1: C14.1 DD2.24 Y1.1 | length 13.4
  Top Layer w0.5: DD2.24 48.26,-71.71 48.59,-72.04 ; C14.1@49.45,-75.5 49.45,-72.9 48.59,-72.04 ; Y1.1 52.64,-72.04 48.59,-72.04
NetD2_1: D2.1 L1.1 U2.2 | length 20.2
  Top Layer w0.8: D2.1 6.025,-26.9 6.025,-27.525 8,-29.5 8,-31.5 9.115,-32.615 10.57,-32.615 12.707,-32.615 13,-32.908 13,-37.2 10.037,-40.163
NetDD1_7: DD1.7 DD2.3 | length 44.1
  Top Layer w0.5: v1(35,-38.6) 36.95,-36.65 DD1.7 ; DD2.3 50.8,-53.7 54.6,-49.9 v1(54.6,-38.6)
  Bottom Layer w0.5: v1(35,-38.6) v1(54.6,-38.6)
NetDD1_14: DD1.14 DD2.9 R24.2 | length 20.7
  Top Layer w0.5: DD2.9 43.18,-53.53 R24.2 44.2,-53.35 44.646,-52.904 44.646,-42.346 43.55,-41.25 DD1.14
NetDD1_19: DD1.19 R31.1 | length 59
  Top Layer w0.5: DD1.19 46.51,-35.86 46.945,-35.86 46.956,-35.871 47.285,-35.871 47.496,-36.083 48.253,-36.083 v1(48.4,-36.23) ; R31.1 54.5,-75.35 54.5,-74.5 55,-74 59.6,-74 60.5,-73.1 60.5,-36.23 v1(60.17,-35.9)
  Bottom Layer w0.5: v1(48.4,-36.23) 48.4,-36.09 48.59,-35.9 v1(60.17,-35.9)
NetDD1_22: DD1.22 R32.1 | length 62.8
  Top Layer w0.5: DD1.22@46.536,-33.429 46.548,-33.44 46.945,-33.44 46.956,-33.429 47.974,-33.429 v1(49.603,-31.8) ; R32.1 59.75,-75.45 61.5,-73.7 61.5,-32.5 61.1,-32.1 v1(61.1,-31.8)
  Bottom Layer w0.5: v1(49.603,-31.8) v1(61.1,-31.8)
NetDD1_32: DD1.32 DD2.4 | length 46.6
  Top Layer w0.5: v1(38.4,-29) 38.8,-29.4 39.257,-29.4 39.55,-29.693 DD1.32 ; DD2.4 49.53,-53.53 52.8,-50.26 v1(52.8,-29)
  Bottom Layer w0.5: v1(38.4,-29) v1(52.8,-29)
NetDD2_6: DD2.6 R25.2 | length 3.7
  Top Layer w0.5: DD2.6 46.99,-55.91 47.9,-55 47.9,-54.35 R25.2
NetDD2_10: DD2.10 R23.2 | length 4.8
  Top Layer w0.5: R23.2 40.5,-53.45 40.5,-54.4 41.91,-55.81 DD2.10
NetDD2_14: DD2.14 R28.2 | length 10.6
  Top Layer w0.5: R28.2 31.5,-55.3 32.3,-54.5 36,-54.5 36.83,-55.33 DD2.14
NetR2_2: R2.2 XP1.5 | length 4.4
  Top Layer w0.5: R2.2 XP1.5
NetR3_2: R3.2 XP1.7 | length 4.4
  Top Layer w0.5: R3.2 XP1.7
NetR4_2: R4.2 XP1.9 | length 4.4
  Top Layer w0.5: R4.2 XP1.9
NetR5_2: R5.2 XP1.11 | length 4.4
  Top Layer w0.5: R5.2 XP1.11
NetR6_2: R6.2 XP1.13 | length 4.4
  Top Layer w0.5: R6.2 XP1.13
NetR7_2: R7.2 XP1.15 | length 4.4
  Top Layer w0.5: R7.2 XP1.15
NetR8_2: R8.2 XP1.17 | length 4.4
  Top Layer w0.5: R8.2 XP1.17
NetR9_2: R9.2 XP1.19 | length 4.4
  Top Layer w0.5: R9.2 XP1.19
NetR10_2: R10.2 XP1.21 | length 4.4
  Top Layer w0.5: R10.2 XP1.21
NetR11_2: R11.2 XP1.23 | length 4.4
  Top Layer w0.5: R11.2 XP1.23
NetR12_2: R12.2 XP1.25 | length 4.4
  Top Layer w0.5: R12.2 XP1.25
NetR13_2: R13.2 XP1.27 | length 4.4
  Top Layer w0.5: R13.2 XP1.27
NetR14_2: R14.2 XP1.29 | length 4.4
  Top Layer w0.5: R14.2 XP1.29
NetR15_2: R15.2 XP1.31 | length 4.4
  Top Layer w0.5: R15.2 XP1.31
NetR16_2: R16.2 XP1.33 | length 4.4
  Top Layer w0.5: R16.2 XP1.33
NetR20_2: R20.2 XP2.3 | length 4.1
  Top Layer w0.5: XP2.3 23.2,-28.09 R20.2
NetR21_1: R21.1 R22.1 U2.5 | length 16.7
  Top Layer w0.5: U2.5 19.855,-35.155 21.861,-37.161 21.861,-40.639 21.1,-41.4 19.15,-41.4 R21.1 R22.1
NetR33_1: R33.1 XS1.12 | length 8.6
  Top Layer w0.5: XS1.12 24.52,-79.18 25.2,-78.5 R33.1
NetR34_1: R34.1 XS1.9 | length 29.4
  Top Layer w0.5: XS1.9 5.1,-80.7 6,-81.6 27.3,-81.6 29.4,-79.5 R34.1
PB3: DD1.15 DD2.7 XP5.4 | length 88.5
  Top Layer w0.5: DD1.15 44.35,-40.2 47.5,-43.35 v1(47.5,-44.1) 47.5,-49.812 46.446,-50.866 46.446,-54.67 45.72,-55.396 DD2.7 ; XP5.4 57.8,-84.15 57.8,-85 58.607,-85.807 61.593,-85.807 62.3,-85.1 62.3,-82.2 65.5,-79 66.2,-78.3 v1(66.2,-44.3)
  Bottom Layer w0.5: v1(47.5,-44.1) 47.55,-44.15 63.139,-44.15 63.228,-44.061 64.172,-44.061 64.411,-44.3 v1(66.2,-44.3) v1@66.422,-44.3
PB4: DD1.16 R25.1 XP5.1 | length 68.5
  Top Layer w0.5: DD1.16 45.15,-39.45 49.1,-43.4 v1(49.1,-47.6) 49.1,-50.25 R25.1 ; XP5.1 61.6,-81.44 65.1,-77.94 65.1,-47.7 65.1,-47.6 v1(65,-47.7)
  Bottom Layer w0.5: v1(49.1,-47.6) 65.4,-47.6 65.3,-47.7 v1(65,-47.7)
PB5: DD1.17 DD2.8 XP5.3 | length 79.8
  Top Layer w0.5: DD2.8 44.45,-55.6 45.692,-54.358 45.692,-50.554 46.19,-50.056 v1(46.19,-45.2) ; DD1.17 46.95,-37.45 50.7,-41.2 v1(50.7,-45.3) ; XP5.3 57.879,-81.191 57.879,-80.621 61.8,-76.7 63.7,-74.8 v1(63.7,-45.2)
  Bottom Layer w0.5: v1@46.19,-45.3 v1(50.7,-45.3) 63.6,-45.3 v1(63.7,-45.2) 64.1,-45.2 64.2,-45.3
PC6: DD1.29 R35.2 XP5.5 | length 92.3
  Top Layer w0.5: v1(41.948,-23.3) 41.948,-30.498 DD1.29 ; R35.2 55.08,-81.45 XP5.5 57.33,-79.2 58,-79.2 60.661,-76.539 62.4,-74.8 v1(62.4,-23.3)
  Bottom Layer w0.5: v1(41.948,-23.3) v1(62.4,-23.3)
RD+: DD2.13 R27.1 XS1.3 | length 58.3
  Top Layer w0.5: v1(6.8,-61.5) 4.8,-63.5 4.8,-68.7 7.1,-71 9.1,-71 9.815,-70.285 XS1.3 ; R27.1 26.2,-57.45 v1(26.2,-54.2) ; DD2.13@38.062,-56.824 v1(38.062,-53.9) ; DD2.13 DD2.13@38.19,-57.477
  Bottom Layer w0.5: v1(6.8,-61.5) 8.838,-61.5 16.238,-54.1 26.1,-54.1 v1(26.2,-54.2) 38.362,-54.2 38.223,-54.062 v1@37.9,-54.062
RD-: DD2.12 R26.1 XS1.6 | length 36.9
  Top Layer w0.5: v1(13.6,-59.5) 13.625,-59.525 XS1.6 ; R26.1 23.3,-57.45 v1(23.3,-55.8) ; DD2.12 v1(39.37,-55.7)
  Bottom Layer w0.5: v1(13.6,-59.5) 17.3,-55.8 v1(23.3,-55.8) 39.27,-55.8 v1(39.37,-55.7)
TCT: C11.1 L2.1 R29.2 R30.2 XS1.4 | length 28.4
  Top Layer w0.5: XS1.4 11.085,-62.153 11.43,-61.808 v1(11.43,-61.6) ; v1(23.1,-61.7) 23.1,-63.481 23.134,-63.516 23.1,-63.55 R29.2 R30.2 26.1,-64.6 26.5,-65 28.4,-65 28.8,-65.4 C11.1 28.876,-66.324 L2.1
  Bottom Layer w0.5: v1(11.43,-61.6) 11.53,-61.7 v1(23.1,-61.7)
TD+: DD2.17 R30.1 XS1.1 | length 42.5
  Top Layer w0.5: v1(26.1,-69.6) R30.1 ; v1(39.37,-69.9) DD2.17
  Bottom Layer w0.5: XS1.1 7.275,-69.875 7.748,-70.348 16.138,-70.348 18.186,-68.3 20.5,-68.3 21.8,-69.6 v1(26.1,-69.6) 31.521,-69.6 32.267,-70.346 38.716,-70.346 39.162,-69.9 v1(39.37,-69.9)
TD-: DD2.16 R29.1 XS1.2 | length 37.5
  Top Layer w0.5: v1(23.19,-68.2) 23.19,-66.36 R29.1 ; v1(37,-69.2) 37.225,-69.2 37.554,-68.871 37.561,-68.871 38.062,-68.37 38.062,-66.805 DD2.16
  Bottom Layer w0.5: XS1.2 8.545,-64.121 9.466,-63.2 17.342,-63.2 22.287,-68.145 23.134,-68.145 v1(23.19,-68.2) 23.266,-68.123 31.4,-68.123 32.477,-69.2 v1(37,-69.2)
VCC: D1.1 XP6.1 | length 7.9
  Top Layer w1: XP6.1 13.15,-6.35 13.93,-7.13 D1.1
X3: R1.1 XP2.1 | length 7.9
  Top Layer w0.5: XP2.1 R1.1
X5: DD1.12 R2.1 R20.1 | length 56.5
  Top Layer w0.5: R20.1 25.68,-34.85 25.73,-34.8 ; v1(25.73,-45.8) 25.73,-34.8 ; R2.1 25.73,-34.8 ; DD1.12@41.929,-39.256 41.94,-39.245 41.94,-38.81 DD1.12 v1(42,-44.9)
  Bottom Layer w0.5: v1(25.73,-45.8) 41.1,-45.8 v1(42,-44.9)
X7: DD1.13 R3.1 | length 56.5
  Top Layer w0.5: v1(28.27,-47.5) 28.339,-47.431 28.339,-15.119 R3.1 ; DD1.13 42.75,-43.431 43.35,-44.031 v1(43.35,-47.5)
  Bottom Layer w0.5: v1(28.27,-47.5) v1(43.35,-47.5)
X9: DD1.30 R4.1 | length 24.8
  Top Layer w0.5: v1(30.8,-25.7) 30.8,-15.06 R4.1 ; v1(39.3,-25.7) 39.4,-25.8 39.6,-25.8 41.15,-27.35 DD1.30
  Bottom Layer w0.5: v1(30.8,-25.7) v1(39.3,-25.7)
X11: DD1.31 R5.1 | length 21.7
  Top Layer w0.5: R5.1 33.35,-27.45 v1(33.4,-27.5) ; v1(39.3,-27.6) 40.35,-28.65 DD1.31
  Bottom Layer w0.5: v1(33.4,-27.5) 39.2,-27.5 v1(39.3,-27.6)
X13: DD1.1 R6.1 | length 18.9
  Top Layer w0.5: R6.1 35.89,-31.44 36.3,-31.85 DD1.1
X15: DD1.2 R7.1 | length 24.2
  Top Layer w0.5: v1(34.6,-16.9) 34.6,-31.24 35.995,-32.636 37.75,-32.636 37.755,-32.64 38.19,-32.64 DD1.2 ; v1(38.4,-16.9) 38.43,-16.87 R7.1
  Bottom Layer w0.5: v1(34.6,-16.9) v1(38.4,-16.9)
X17: DD1.9 R8.1 | length 44.3
  Top Layer w0.5: v1(30.5,-39.8) 30.5,-32.8 32.1,-31.2 v1(32.1,-18.7) ; v1(38.19,-39.9) 39.25,-39.9 39.54,-39.61 39.54,-38.81 DD1.9 ; R8.1 40.97,-18.67 v1(41,-18.7)
  Bottom Layer w0.5: v1(30.5,-39.8) 38.09,-39.8 v1(38.19,-39.9) ; v1(32.1,-18.7) v1(41,-18.7)
X19: DD1.10 R9.1 | length 54.9
  Top Layer w0.5: v1(29.4,-42) 29.454,-42 29.361,-41.907 29.361,-37 29.6,-36.761 v1(29.6,-20) ; v1(39,-42.1) 40.35,-40.75 DD1.10 ; v1(43.5,-20.2) 43.539,-20.161 43.539,-15.079 R9.1
  Bottom Layer w0.5: v1(29.4,-42) 38.7,-42 38.8,-42.1 38.9,-42 v1(39,-42.1) ; v1(29.6,-20) 29.808,-20 30.008,-20.2 v1(43.5,-20.2)
X21: DD1.11 R10.1 | length 66.6
  Top Layer w0.5: v1@27.1,-43.8 v1(27.2,-43.8) v1(27.2,-22.1) ; v1(40.7,-43.8) 40.7,-43.793 41.15,-43.343 DD1.11 ; R10.1 46,-15.1 46.2,-15.3 v1(46.2,-22)
  Bottom Layer w0.5: v1(27.2,-43.8) v1(40.7,-43.8) ; v1(27.2,-22.1) 27.3,-22 v1(46.2,-22)
X23: DD1.23 R11.1 | length 18.9
  Top Layer w0.5: DD1.23 46.51,-32.64 47.211,-32.64 48.59,-31.262 R11.1
X25: DD1.24 R12.1 | length 21.4
  Top Layer w0.5: DD1.24 46.886,-31.85 46.956,-31.78 v1(46.956,-30.4) ; v1(51.1,-30.4) 51.13,-30.37 R12.1
  Bottom Layer w0.5: v1(46.956,-30.4) v1(51.1,-30.4)
X27: DD1.25 R13.1 | length 22.8
  Top Layer w0.5: DD1.25 45.15,-30.086 45.204,-30.032 45.204,-29.196 47.1,-27.3 v1(47.1,-26.2) ; v1(53.67,-26.1) R13.1
  Bottom Layer w0.5: v1(47.1,-26.2) 47.2,-26.1 v1(53.67,-26.1)
X29: DD1.26 R14.1 | length 25.5
  Top Layer w0.5: DD1.26 44.36,-30.49 44.36,-30.055 44.371,-30.044 44.371,-29.777 44.45,-29.698 44.45,-28.6 45.6,-27.45 45.6,-25.5 47.4,-23.7 v1(47.4,-20.5) ; v1(56.2,-20.4) 56.21,-20.39 R14.1
  Bottom Layer w0.5: v1(47.4,-20.5) 47.5,-20.4 v1(56.2,-20.4)
X31: DD1.27 R15.1 | length 29.9
  Top Layer w0.5: DD1.27 43.56,-30.49 43.56,-30.055 43.571,-30.044 43.571,-29.777 43.6,-29.748 43.6,-28.3 44.7,-27.2 v1(44.7,-18.59) ; v1(58.75,-18.4) R15.1
  Bottom Layer w0.5: v1(44.7,-18.59) 44.908,-18.59 45.098,-18.4 v1(58.75,-18.4)
X33: DD1.28 R16.1 | length 35
  Top Layer w0.5: v1(42.4,-16.8) 42.4,-19.689 42.361,-19.728 42.361,-21.436 43.35,-22.425 43.35,-26.15 42.75,-26.75 DD1.28 ; v1(61.29,-16.8) R16.1
  Bottom Layer w0.5: v1(42.4,-16.8) v1(61.29,-16.8)
pads on no net: DD1.8 DD2.5 XS1.5 XS1.7

## Polygon pours and split planes (outlines as drawn)
GND on Top Layer "Top Layer-GND 3" (solid, pour order 6): 3.983,-61.983 20.9,-61.983 20.9,-49.6 20.8,-49.5 30.4,-39.9 32.95,-39.9 38.952,-45.902 38.952,-53.448 38.3,-54.1 23.9,-54.1 23.9,-55.4 22.1,-57.2 22.3,-57.4 22.4,-71 23.9,-71 23.9,-78.1 30.81,-78.1 30.81,-71 32.9,-71 32.9,-72.504 35.3,-72.5 35.3,-70.9 40.1,-70.9 40.1,-73.4 45.8,-73.4 45.6,-73.6 45.6,-78.4 52.4,-78.4 52.6,-78.6 52.6,-86.5 0.36,-86.5 0.36,-61.9
GND on Top Layer "Top Layer-GND 2" (solid, pour order 8): 52.6,-86.5 67.6,-86.5 67.6,-3.9 63.7,-3.9 63.7,-43.1 66.8,-43.1 66.8,-78.9 62.8,-82.9 62.8,-85.3 53.9,-85.3 52.6,-84.879
GND on Top Layer "Top Layer-GND" (solid, pour order 2): 0.36,-3.295 0.36,-62.1 4.1,-62.1 3.5,-61.5 3.5,-5.5 3.5,-3.305
GND on Top Layer "Top Layer-GND 1" (solid, pour order 0): 0.36,-0.4 0.36,-3.89 0.37,-3.9 67.6,-3.9 67.6,-0.4
GND on Bottom Layer "Bottom Layer-GND" (solid, pour order 4): 0.2,-0.2 67.8,-0.2 67.8,-86.5 67.4,-86.5 0.4,-86.5

## Keep-outs
Keep-Out Layer:
  the board outline again, w0.1

## Text inside footprints (layer, text, board x,y; h text height)
XP1: Top Overlay "34" at 60.35,-3.3 h1.27; Top Overlay "33" at 60.25,-11.3 h1.27; Top Overlay "1" at 20.45,-11.5 h1.27; Top Overlay "2" at 20.25,-3 h1.27